# Altium PCB PCB1.PcbDoc
Units mm, origin at the board's own origin, x right, y up, seen from the top; angles counter-clockwise.
Board outline 32.4 x 32.4 mm, 2 copper layers (Top Copper, Bottom Copper), stack 1.135 mm thick; 8 components, 8 nets, 35 pads, 7 vias.
Unrouted connection lines stored in the file: 5.
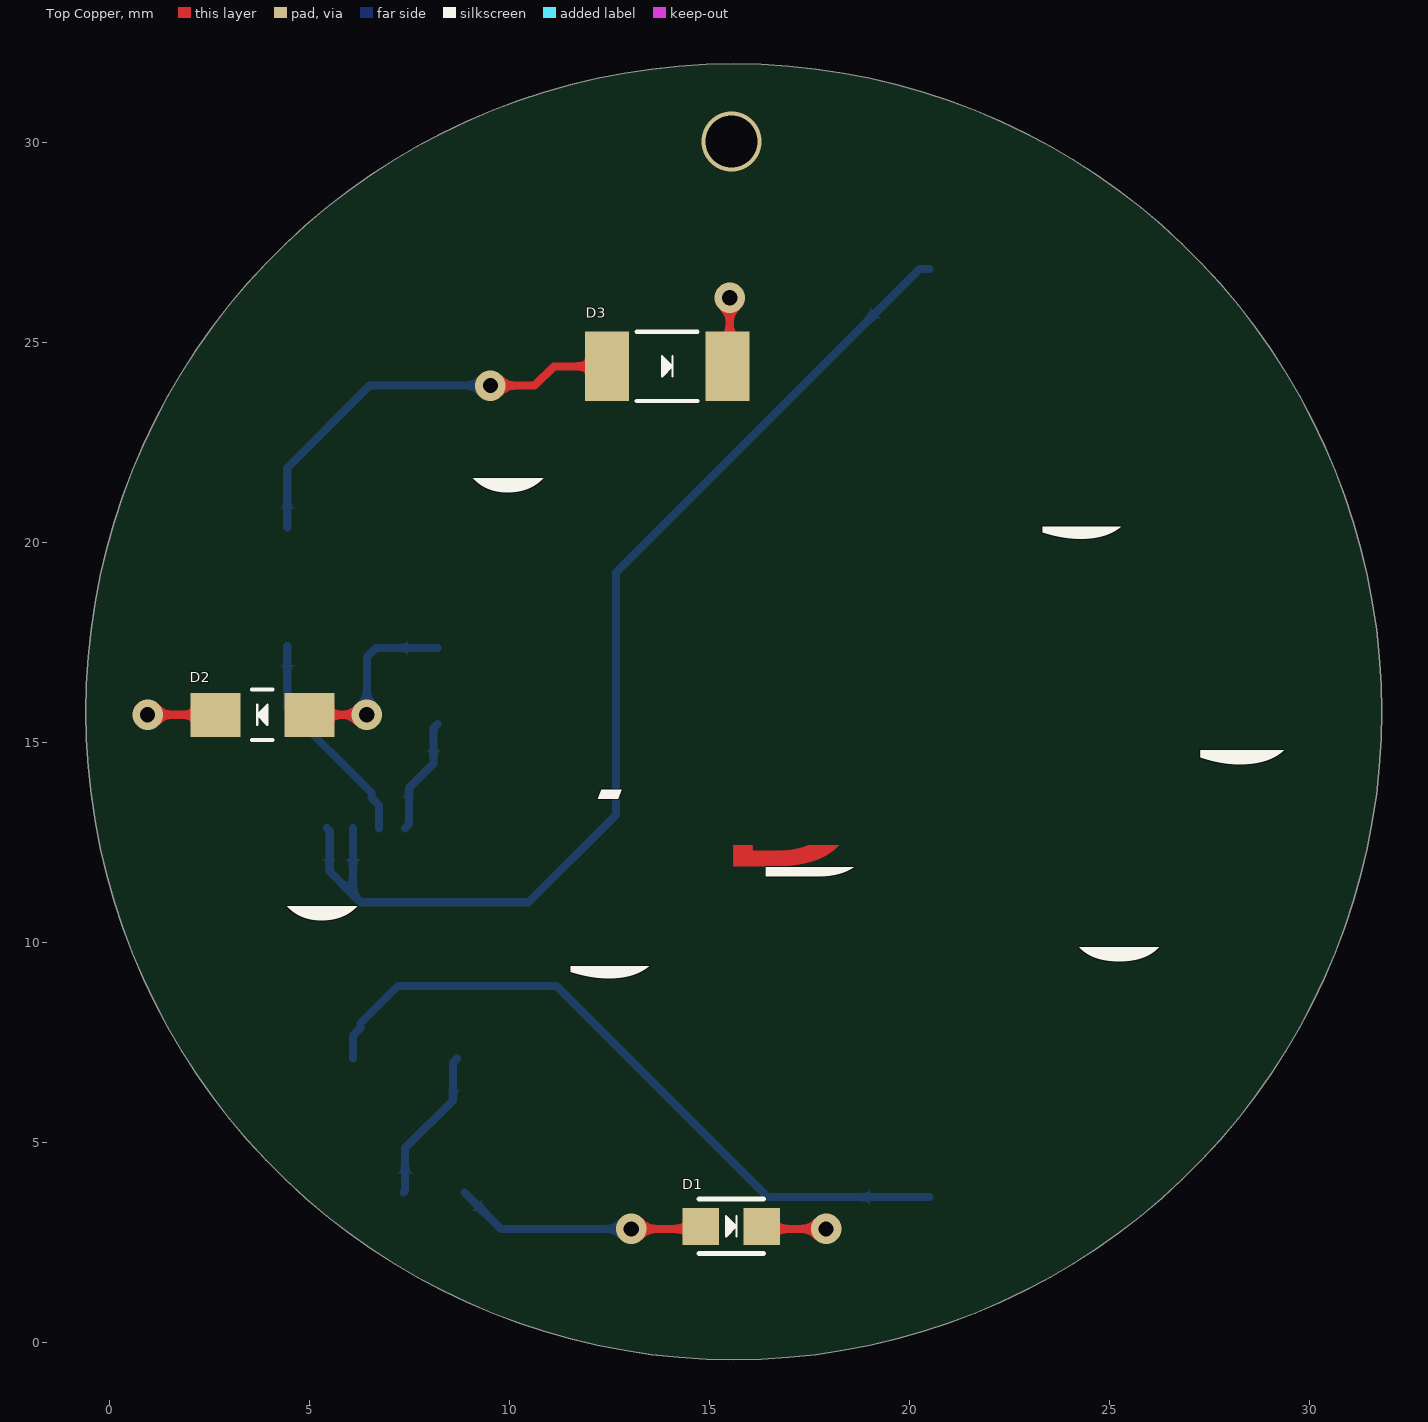
[diagram p0: Top Copper view]
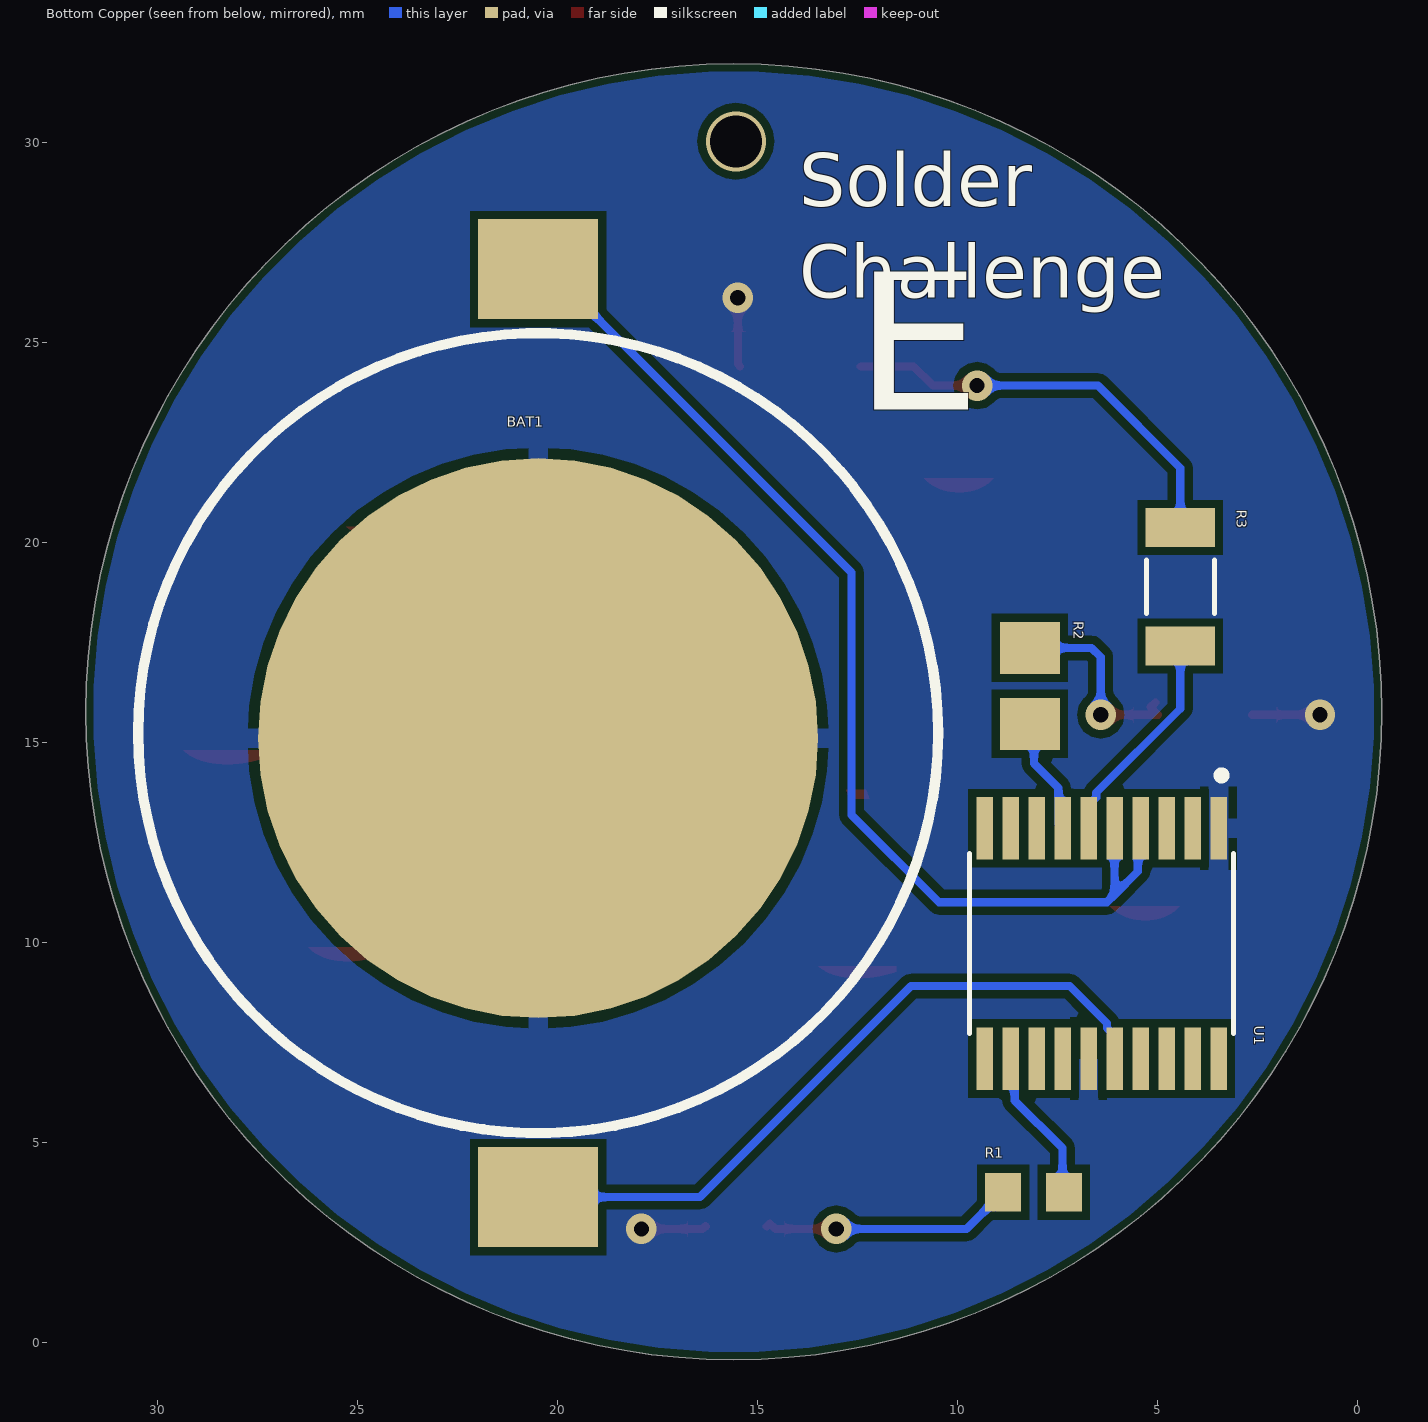
[diagram p1: Bottom Copper view, seen from below]

## Layer stack, top to bottom
Top Mask: solder mask 0.015, Solder Resist, Dk 3.8
Top Copper: signal copper 0.035
Core: core 1.065, FR-4, Dk 4.5
Bottom Copper: signal copper 0.035
Bottom Mask: solder mask 0.015, Solder Resist, Dk 3.8

## Board outline
15.596,-0.427 cw(c15.596,15.773) -0.604,15.773 cw(c15.596,15.773) 15.596,31.973 cw(c15.596,15.773) 31.796,15.773 cw(c15.596,15.773)

## Design rules (kind name [scope] priority, off if disabled: settings)
BoardOutlineClearance [All] p1: gap=0.2 ignorepadtopadclearanceinfootprint=FALSE except(0.4: Arc-SplitBarrior Arc-SplitContinuation Track-SplitBarrior Track-SplitContinuation SMDPad-SplitBarrior SMDPad-SplitContinuation THPad-SplitBarrior THPad-SplitContinuation Via-SplitBarrior Via-SplitContinuation Fill-SplitBarrior Fill-SplitContinuation Poly-SplitBarrior Poly-SplitContinuation Region-SplitBarrior Region-SplitContinuation Text-SplitBarrior Text-SplitContinuation)
Clearance "Clearance Bottom Layer" [OnLayer('Bottom Layer')] p1: gap=0.203 ignorepadtopadclearanceinfootprint=TRUE except(0.254: Arc-Text Track-Text SMDPad-Text THPad-Text Via-Text Fill-Text Poly-Text Region-Text Text-Text)
Clearance "Clearance Top Layer" [OnLayer('Top Layer')] p2: gap=0.203 ignorepadtopadclearanceinfootprint=TRUE except(0.254: Arc-Text Track-Text SMDPad-Text THPad-Text Via-Text Fill-Text Poly-Text Region-Text Text-Text)
Clearance [All] p3: gap=0.2 ignorepadtopadclearanceinfootprint=FALSE except(0.089: Arc-Arc Arc-Track Arc-SMDPad Track-Track Track-SMDPad SMDPad-SMDPad; 0.127: Arc-Via Track-Via SMDPad-Via THPad-Via Via-Via; 0.254: Arc-Text Track-Text SMDPad-Text THPad-Text Via-Text Fill-Text Poly-Text Region-Text Text-Text)
HoleSize [All] p1: absolutevalues=TRUE maxlimit=6.3 minlimit=0.2 maxpercent=80.000 minpercent=20.000
MinimumAnnularRing [All] p1: minimumring=0.076
MinimumSolderMaskSliver [All] p1: minsoldermaskwidth=0.1
PolygonConnect PolygonConnect_1 [All] p1: thpad.connectstyle=Relief thpad.reliefconductorwidth=0.508 thpad.reliefentries=4 thpad.polygonreliefangle="90 Angle" thpad.airgapwidth=0.254 smdpad.connectstyle=Relief smdpad.reliefconductorwidth=0.508 smdpad.reliefentries=4 smdpad.polygonreliefangle="90 Angle" smdpad.airgapwidth=0.254 via.connectstyle=Direct via.reliefconductorwidth=0.508 via.reliefentries=4 via.polygonreliefangle="90 Angle" via.airgapwidth=0.254
RoutingCorners [All] p1: cornerstyle=Round minsetback=2.54 maxsetback=2.54
RoutingVias [All] p1: holewidth=0.5 width=1 viastyle="Through Hole" minholewidth=0.2 minwidth=0.45 maxholewidth=1 maxwidth=2
SilkToSilkClearance [All] p1: silktosilkclearance=0.1
SilkToSolderMaskClearance [IsPad] p1: minsilkscreentomaskgap=0.1 clearancetoexposedcopper=TRUE
SolderMaskExpansion [All] p1: expansion=0.102
Width [All] p1: maxlimit=2.54 minlimit=0.089 preferedwidth=0.381
25 further rules are at their usual default settings.

## Components (designator, comment, footprint, x,y, rotation, side; value= is the part's Value field where it differs from the comment)
BAT1 "BAT2032" PCBComponent_1 20.485,15.24 r0 bottom
D1 "D0603" LEDC1608X65N 15.532,2.908 r180 top
D2 "D0805" MY_0805 3.81,15.697 r0 top
D3 "D1206" MY_1206 13.932,24.409 r180 top
R1 "R0603" RESC1508X55N 8.103,3.759 r0 bottom
R2 "R0805" RESC2012X60 8.191,16.421 r90 bottom
R3 "R1206" RESC3116X65N 4.432,18.898 r90 bottom
U1 "STM32F030F4P6" SOP65P640X120-20N 6.401,9.982 r270 bottom

## Footprints (in the part's own frame and the unit in brackets; to place one, negate y for a bottom-side part, rotate by r counter-clockwise, add the part's x,y. Pads: shape width x height; smd on the part's side, far side on the other; paste and mask are expansions set on the pad)
LEDC1608X65N [mm]
  rect 0.91x0.93 smd: A(0.76,0) C(-0.76,0)
  silkscreen extent -0.8,-0.68 0.8,0.68
MY_0805 [mm]
  rect 1.25x1.1 smd: A(1.175,0) C(-1.175,0)
  silkscreen extent -0.25,-0.64 0.25,0.64
MY_1206 [mm]
  rect 1.1x1.73 smd: A(1.51,0) C(-1.51,0)
  silkscreen extent -0.76,-0.86 0.76,0.86
PCBComponent_1 [mm]
  rect 3x2.5 smd: 1(0,-11.6) 1(0,11.6)
  round 14 smd: 2(0,0.127)
  silkscreen extent -10,-10 10,10
RESC1508X55N [mm]
  rect 0.9x0.97 smd: 1(-0.76,0) 2(0.76,0)
RESC2012X60 [mm]
  rect 1.3x1.5 smd: 1(-0.95,0) 2(0.95,0)
RESC3116X65N [mm]
  rect 0.97x1.73 smd: 1(-1.48,0) 2(1.48,0)
  silkscreen extent -0.67,-0.85 0.67,0.85, body extent -1.55,-0.8 1.55,0.8, height 0.65
SOP65P640X120-20N [mm]
  rect 1.56x0.41 smd: 1(-2.88,2.925) 2(-2.88,2.275) 3(-2.88,1.625) 4(-2.88,0.975) 5(-2.88,0.325) 6(-2.88,-0.325) 7(-2.88,-0.975) 8(-2.88,-1.625) 9(-2.88,-2.275) 10(-2.88,-2.925) 11(2.88,-2.925) 12(2.88,-2.275) 13(2.88,-1.625) 14(2.88,-0.975) 15(2.88,-0.325) 16(2.88,0.325) 17(2.88,0.975) 18(2.88,1.625) 19(2.88,2.275) 20(2.88,2.925)
  silkscreen extent -4.3,-3.3 2.25,3.3

## Part data
BAT1: "Cell coin 2032"
D1: "White LED Indication - Discrete 3.1V 0603 _1608 Metric_", Package="0603 Lite-On", Availability=Unavailable, MF=Lite-On, MP=LTW-C191TLA, Price=None, SnapEDA_Link=https://www.snapeda.com/parts/LTW-C191TLA/Lite-On/view-part/538855/?ref=snap
D2: "White LED Indication - Discrete 2.9V 0805 _2012 Metric_", Package="0805 Rohm Semiconductor", Availability=Unavailable, MF="Rohm Semiconductor", MP=SMLMN2WB1CW1C, Price=None, SnapEDA_Link=https://www.snapeda.com/parts/SMLMN2WB1CW1C/Rohm/view-part/3217279/?ref=snap
D3: "Red 631nm LED Indication - Discrete 2V 1206 _3216 Metric_", Package="1206 Lite-On", Digi-Key_Part_Number=160-1457-1-ND, Digi-Key_Purchase_URL=https://www.digikey.com/product-detail/en/lite-on-inc/LTST-C230KRKT/160-1457-1-ND/386856?utm_source=snapeda&utm_medium=aggregator&utm_campaign=symbol, MF="Lite-On Inc.", MP=LTST-C230KRKT, SnapEDA_Link=https://www.snapeda.com/parts/LTST-C230KRKT/Lite-On%20Inc./view-part/358143/?ref=snap
R1: "0 Ohms Jumper 0.1W, 1/10W Chip Resistor 0603 _1608 Metric_ Automotive AEC-Q200 Thick Film", Package="1508 Stackpole", Availability=Unavailable, MF="Stackpole Electronics Inc", MP=RMCF0603ZT0R00, Price=None, SnapEDA_Link=https://www.snapeda.com/parts/RMCF0603ZT0R00/Stackpole%20Electronics%20Inc/view-part/3968849/?ref=snap
R2: "0 Ohms Jumper 0.125W, 1/8W Chip Resistor 0805 (2012 Metric) Moisture Resistant Thick Film", Package="0805 Yageo", Availability=Unavailable, DigiKey-Purchase-URL=https://snapeda.com/shop?store=DigiKey&id=106114, MF=Yageo, Mouser-Purchase-URL=https://snapeda.com/shop?store=Mouser&id=106114, MP=RC0805JR-070RL, Price=None, SnapEDA_Link=https://www.snapeda.com/parts/RC0805JR-070RL/Yageo/view-part/106114/?ref=snap
R3: "22 Ohms ±5% 0.25W, 1/4W Chip Resistor 1206 (3216 Metric) Thick Film", Package="3116 Yageo", Availability=Good, MF=Yageo, MP=RC1206JR-0722RL, Price=None, Purchase-URL=https://pricing.snapeda.com/search/part/RC1206JR-0722RL/?ref=eda, SnapEDA_Link=https://www.snapeda.com/parts/RC1206JR-0722RL/Yageo/view-part/615366/?ref=snap
U1: "ARM® Cortex®-M0 STM32F0 Microcontroller IC 32-Bit 48MHz 16KB _16K x 8_ FLASH", Package="TSSOP-20 STMicroelectronics", Digi-Key_Part_Number=497-14044-5-ND, Digi-Key_Purchase_URL=https://www.digikey.vn/product-detail/en/stmicroelectronics/STM32F030F4P6/497-14044-5-ND/4357517?utm_source=snapeda&utm_medium=aggregator&utm_campaign=symbol, MF=STMicroelectronics, MP=STM32F030F4P6, SnapEDA_Link=https://www.snapeda.com/parts/STM32F030F4P6/STMicroelectronics/view-part/46809/?ref=snap

## Via types
v1: diameter 0.762, hole 0.381, Top Copper to Bottom Copper, tented both sides, 6 vias
v2: diameter 1.5/1.5 (per signal layer), hole 1.3, Top Copper to Bottom Copper, 1 vias

## Nets (pads, with @x,y where several pads share a name; then routed paths per layer and width w, separated by ;. In a path a pad name is that pad's centre, name@x,y a point inside that pad or via, vN(x,y) a via of type N, cw(c..) or ccw(c..) an arc to the next point about the centre after c; other vN are vias at no path point)
GND: BAT1.2 D1.C D2.C D3.C U1.1 U1.15 | length 5.1
  Top Copper w0.203: v1(0.94,15.697) D2.C ; D3.C 15.494,24.462 v1(15.494,26.124) ; D1.C 16.305,2.921 16.381,2.845 v1(17.903,2.845)
NetD1_A: D1.A R1.2 | length 6.4
  Top Copper w0.203: v1(13.031,2.845) 14.556,2.845 14.696,2.984 D1.A
  Bottom Copper w0.203: R1.2 9.777,2.845 v1(13.031,2.845)
NetD2_A: D2.A R2.2 | length 5.2
  Top Copper w0.203: D2.A@5.056,16.007 5.175,15.888 D2.A v1(6.422,15.697)
  Bottom Copper w0.203: v1(6.422,15.697) 6.422,17.145 6.648,17.371 R2.2
NetD3_A: D3.A R3.2 | length 10.5
  Top Copper w0.203: v1(9.513,23.927) 10.617,23.927 11.1,24.409 D3.A
  Bottom Copper w0.203: R3.2 4.432,21.871 6.488,23.927 v1(9.513,23.927)
NetR1_1: R1.1 U1.12 | length 3.9
  Bottom Copper w0.203: R1.1 7.379,3.795 7.379,4.864 8.572,6.058 8.572,6.999 U1.12 U1.12@8.679,7.099
NetR2_1: R2.1 U1.7 | length 2.9
  Bottom Copper w0.203: U1.7 7.479,12.966 7.479,13.867 8.09,14.478 8.09,15.369 R2.1
NetR3_1: R3.1 U1.6 | length 5.5
  Bottom Copper w0.203: R3.1 4.432,15.85 6.535,13.747 6.535,13.628 6.726,13.437 U1.6
VCC: BAT1.1 U1.4 U1.5 U1.16 | length 45.9
  Bottom Copper w0.203: U1.4 5.495,12.793 5.495,11.777 6.076,11.196 ; U1.16 6.076,7.677 6.267,7.868 6.267,7.987 7.195,8.915 11.163,8.915 16.439,3.64 BAT1.1@20.485,3.64 ; U1.5 6.076,11.196 ; BAT1.1@20.485,26.84 20.235,26.84 12.649,19.254 12.649,13.195 10.465,11.011 6.261,11.011 6.076,11.196
pads on no net: U1.2 U1.3 U1.8 U1.9 U1.10 U1.11 U1.13 U1.14 U1.17 U1.18 U1.19 U1.20
copper on no net:
  other v2: 15.545,30.035

## Polygon pours and split planes (outlines as drawn)
GND on Bottom Copper "GND_L02_P004" (solid, pour order 4): 15.596,-0.427 cw(c15.596,15.773) -0.604,15.773 cw(c15.596,15.773) 15.596,31.973 cw(c15.596,15.773) 31.796,15.773 cw(c15.596,15.773)

## Other copper
Top Copper:
  text "6" at 8.293,16.662 h24.54
  text "5" at 22.936,15.494 h24.54
  text "3" at 26.886,9.855 h24.54
  text "7" at 11.277,8.918 h24.54
  text "D" at 15.1,7.074 h25.4
  text "6" at 3.645,5.956 h24.54
  text "8" at 23.647,4.94 h24.54
  text "5" at 11.138,4.508 h24.54

## Silkscreen, mask and mechanical layers (free items; w line width, h text height)
Top Overlay:
  text "6" at 8.293,16.662 h24.54
  text "5" at 22.936,15.494 h24.54
  text "3" at 26.886,9.855 h24.54
  text "7" at 11.277,8.918 h24.54
  text "B" at 15.913,6.82 h25.4
  text "6" at 3.645,5.956 h24.54
  text "8" at 23.647,4.94 h24.54
  text "5" at 11.138,4.508 h24.54
Bottom Overlay:
  text "Solder  / Challenge" at 13.957,25.692 h2.29
  text "E" at 12.573,21.882 h7.62
Mechanical 1:
  the board outline again, w1.2